# Altium PCB AMPURR.PcbDoc (part 2 of 6)
Units mm, origin at the board's own origin, x right, y up, seen from the top; angles counter-clockwise.
Board outline 100 x 100 mm, 4 copper layers (Top Layer, GND, VDD, Bottom Layer), stack 1.586 mm thick; 522 components, 281 nets, 1527 pads, 2431 vias.
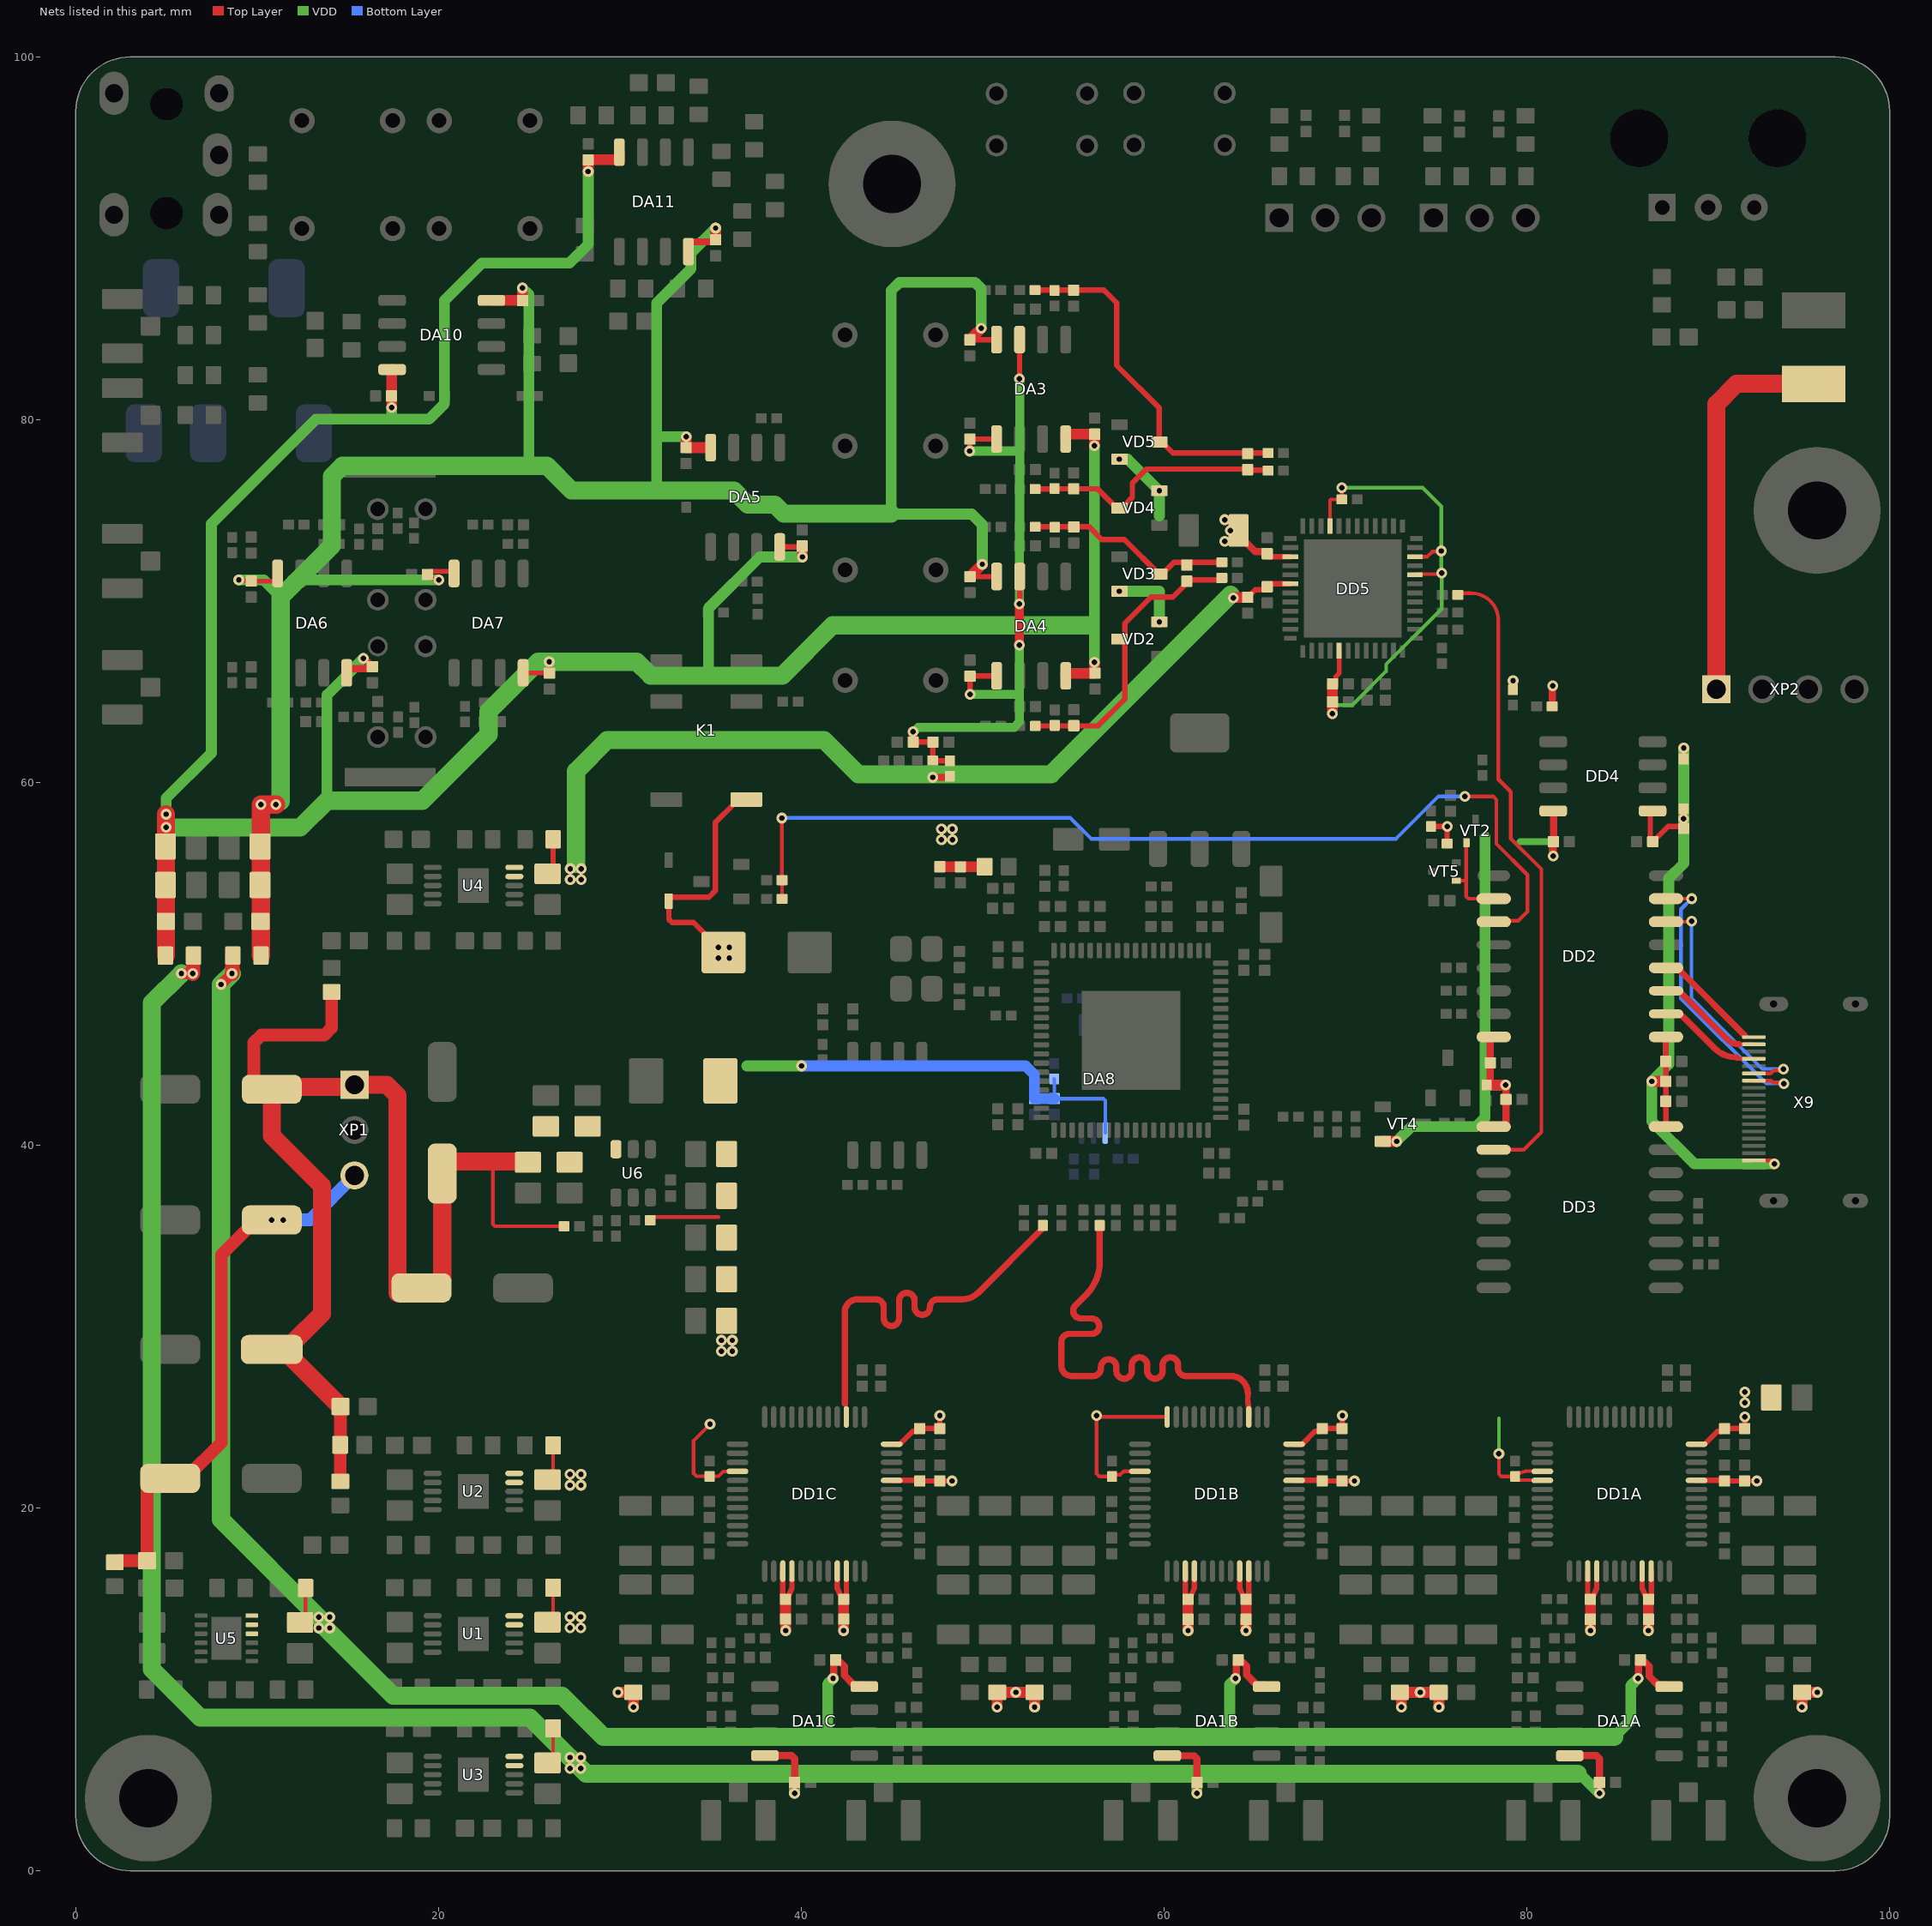
[diagram p4: the nets of this part, all layers, seen from the top]

## Footprints (in the part's own frame and the unit in brackets; to place one, negate y for a bottom-side part, rotate by r counter-clockwise, add the part's x,y. Pads: shape width x height; smd on the part's side, far side on the other; paste and mask are expansions set on the pad) (continued)
U.FL-R-SMT(10)_REC [mm]
  rrect15% 1.05x1.1 smd mask+0.05: 1(0,-1.55)
  rrect15% 1.1x2.25 smd mask+0.05: 2(-1.5,0) 2(1.5,0)
  Top Layer pour cut-out: -1,1.3 -1,-1.3 1,-1.3 1,1.3
  Top Layer keep-out region: -0.75,-0.85 0.75,-0.85 0.75,1.3 -0.75,1.3
  body extent -1.5,-1.55 1.5,1.55, height 1.25
WIMA5 [mm]
  round 1.4 hole 0.8: 1(-2.5,0) 2(2.5,0)
  silkscreen extent -3.63,-2.89 3.64,2.89, body extent -3.49,-2.75 3.51,2.77, height 11
WIMA_2,5x6,5x7,2#1 [mm]
  round 1.1 hole 0.8: 1(-2.5,0)
  round 1.2 hole 0.8: 2(2.5,0)
  silkscreen extent -3.63,-1.29 3.65,1.28, body extent -3.6,-1.25 3.6,1.25, height 6.5
WIMA_2,5x6,5x7,2#2 [mm]
  round 1.2 hole 0.8: 1(-2.5,0) 2(2.5,0)
  silkscreen extent -3.63,-1.29 3.65,1.28, body extent -3.6,-1.25 3.6,1.25, height 6.5

## Part data
C1A C1B C1C C8A C8B C8C C9A C9B C9C C18A C18B C18C C20A C20B C20C C23A C23B C23C C35 C36 C42 C109 C118 C119 C126 C127 C130 C132 C140 C146 C149 C151: library part "10uF  6.3V C0402", "CAP CER 10UF 6.3V X6S 0402", Manufacturer="Murata Electronics North America", Manufacturer P/N=GRM155C80J106ME11D, Operation Temperature="-55°C ~ 105°C", Package/Case=C0402, Power (V/A)=6.3V, Supplier Part Number 1=490-13233-2-ND, Temperature Coefficient=X6S, Tolerance=±20%, ComponentLink1Description=Datasheet, ComponentLink1URL=https://www.murata.com/~/media/webrenewal/support/library/catalog/products/capacitor/mlcc/c02e.ashx?la=en-us, Library Path 1=Capacitors.SchLib, Name Component="Capacitor Ceramic", Part Number="10uF  6.3V C0402", Supplier 1=Digi-key
C2A C2B C2C C3A C3B C3C C10A C10B C10C C14A C14B C14C C17A C17B C17C C19A C19B C19C C120 C121 C124 C129 C131 C133 C134 C135 C138 C141 C143 C147 C148 C150: library part "0.1uF  25V C0403", "CAP CER 0.1UF 25V X7R 0603", Manufacturer="Samsung Electro-Mechanics", Operation Temperature="-55°C ~ 125°C", Package/Case=C0403, Power (V/A)=25V, Supplier Part Number 1=1276-6854-2-ND, Temperature Coefficient=X7R, Tolerance=±10%, ComponentLink1Description=Datasheet, Library Path 1=Capacitors.SchLib, Name Component="Capacitor Ceramic", Part Number="0.1uF  25V C0403"
C4A C4B C4C C5A C5B C5C C6A C6B C6C C7A C7B C7C C26A C26B C26C C27A C27B C27C C28A C28B C28C C29A C29B C29C C105: library part "100uF  10V С1206", "CAP CER 100UF 10V X5T 1206", Operation Temperature="-55°C ~ 105°C", Package/Case=С1206, Power (V/A)=10V, Temperature Coefficient=X5R, Tolerance=±20%, ComponentLink1Description=Datasheet, Library Path 1=Capacitors.SchLib, Name Component="Capacitor Ceramic", Part Number="100uF  10V С1206", Supplier 1=Digi-key
C11A C11B C11C C24A C24B C24C: library part "33nF  16V C0402", "CAP CER 33NF 16V X7R 0402", Manufacturer="AVX Corporation", Operation Temperature="-55°C ~ 105°C", Package/Case=C0402, Power (V/A)=16V, Temperature Coefficient=X7R, Tolerance=±0.25pF, ComponentLink1Description=Datasheet, Library Path 1=Capacitors.SchLib, Name Component="Capacitor Ceramic", Part Number="33nF  16V C0402", Supplier 1=Digi-key
C12A C12B C12C C25A C25B C25C: library part "4.7nF  25V C0402", "CAP CER 4.7NF 25V NP0 0402", Manufacturer="AVX Corporation", Operation Temperature="-55°C ~ 105°C", Package/Case=C0402, Power (V/A)=25V, Temperature Coefficient="C0G, NP0", Tolerance=±0.25pF, ComponentLink1Description=Datasheet, Library Path 1=Capacitors.SchLib, Name Component="Capacitor Ceramic", Part Number="4.7nF  25V C0402", Supplier 1=Digi-key
C13A C13B C13C: library part "1uF  10V C0402", "CAP CER 1UF 10V X7S 0402", Manufacturer="Murata Electronics North America", Manufacturer P/N=GRM155C71A105KE11D, Operation Temperature="-55°C ~ 105°C", Package/Case=C0402, Power (V/A)=10V, Supplier Part Number 1=490-14457-2-ND, Temperature Coefficient=X7S, Tolerance=±10%, ComponentLink1Description=Datasheet, ComponentLink1URL=https://www.murata.com/~/media/webrenewal/support/library/catalog/products/capacitor/mlcc/c02e.ashx?la=en-us, Library Path 1=Capacitors.SchLib, Name Component="Capacitor Ceramic", Part Number="1uF  10V C0402", Supplier 1=Digi-key
C15A C15B C15C C21A C21B C21C C155 C161: library part "1.5nF  50V C0402", "CAP CER 1.5NF 50V NP0 0402", Manufacturer="AVX Corporation", Operation Temperature="-55°C ~ 105°C", Package/Case=C0402, Power (V/A)=50V, Temperature Coefficient="C0G, NP0", Tolerance=±0.25pF, ComponentLink1Description=Datasheet, Library Path 1=Capacitors.SchLib, Name Component="Capacitor Ceramic", Part Number="1.5nF  50V C0402", Supplier 1=Digi-key
C16A C16B C16C C22A C22B C22C: library part "10nF  50V C0402", "CAP CER 10NF 50V NP0 0402", Manufacturer="AVX Corporation", Operation Temperature="-55°C ~ 105°C", Package/Case=C0402, Power (V/A)=50V, Temperature Coefficient="C0G, NP0", Tolerance=±0.25pF, ComponentLink1Description=Datasheet, Library Path 1=Capacitors.SchLib, Name Component="Capacitor Ceramic", Part Number="10nF  50V C0402", Supplier 1=Digi-key
C30A C30B C30C C70: library part "0.1uF  25V C0403", "CAP CER 0.1UF 25V X7R 0402", Manufacturer="Samsung Electro-Mechanics", Operation Temperature="-55°C ~ 125°C", Package/Case=C0403, Power (V/A)=25V, Supplier Part Number 1=1276-6854-2-ND, Temperature Coefficient=X7R, Tolerance=±10%, ComponentLink1Description=Datasheet, Library Path 1=Capacitors.SchLib, Name Component="Capacitor Ceramic", Part Number="0.1uF  25V C0403"
C31A C31B C31C C32A C32B C32C C37 C38 C39 C40 C41 C43 C44 C94 C103 C104 C110 C116 C117 C164 C165 C166 C167 C170 C171 C172 C173: library part "0.1uF  25V C0402", "CAP CER 0.1UF 25V X7R 0603", Manufacturer="Samsung Electro-Mechanics", Operation Temperature="-55°C ~ 125°C", Package/Case=C0402, Power (V/A)=25V, Supplier Part Number 1=1276-6854-2-ND, Temperature Coefficient=X7R, Tolerance=±10%, ComponentLink1Description=Datasheet, Library Path 1=Capacitors.SchLib, Name Component="Capacitor Ceramic", Part Number="0.1uF  25V C0402"
C33 C45 C48 C53 C55 C61 C65 C67 C84 C91 C168 C192 C193: library part "0.1uF  50V C0603", "CAP CER 0.1UF 50V X7R 0603", Manufacturer="Samsung Electro-Mechanics", Manufacturer P/N=CL10B104KB8WPNC, Operation Temperature="-55°C ~ 125°C", Package/Case=C0603, Power (V/A)=50V, Supplier Part Number 1=1276-6854-2-ND, Temperature Coefficient=X7R, Tolerance=±10%, ComponentLink1Description=Datasheet, ComponentLink1URL=https://www.samsungsem.com/resources/file/global/support/product_catalog/MLCC.pdf, Library Path 1=Capacitors.SchLib, Name Component="Capacitor Ceramic", Notes="06035C104K4T4A, 06035C104K4T2A", Part Number="0.1uF  50V C0603", Supplier 1=Digi-key
C34: library part "10uF  35V C0603", "CAP CER 10UF 35V X5R 0603", Manufacturer="Murata Electronics North America", Manufacturer P/N=GRM188R6YA106MA73D, Operation Temperature="-55°C ~ 105°C", Package/Case=C0603, Power (V/A)=35V, Supplier Part Number 1=490-13248-2-ND, Temperature Coefficient=X5R, Tolerance=±20%, ComponentLink1Description=Datasheet, ComponentLink1URL=https://search.murata.co.jp/Ceramy/image/img/A01X/G101/ENG/GRM188R6YA106MA73-01.pdf, Library Path 1=Capacitors.SchLib, Name Component="Capacitor Ceramic", Part Number="10uF  35V C0603", Supplier 1=Digi-key
C46 C47 C49 C50 C54 C58 C59 C60 C68 C69 C72 C73 C74 C76 C77 C78 C79 C80 C81 C85 C89 C95 C97: library part "10uF  25V C0805", "CAP CER 10UF 25V X5R 0805", Manufacturer="Murata Electronics North America", Manufacturer P/N=GRM21BR61E106KA73L, Operation Temperature="-55°C ~ 105°C", Package/Case=C0805, Power (V/A)=25V, Supplier Part Number 1=490-5523-2-ND, Temperature Coefficient=X5R, Tolerance=±10%, ComponentLink1Description=Datasheet, ComponentLink1URL=https://www.murata.com/~/media/webrenewal/support/library/catalog/products/capacitor/mlcc/c02e.ashx?la=en-us, Library Path 1=Capacitors.SchLib, Name Component="Capacitor Ceramic", Notes="GRM21BR61E106KA73K, 08053D106KAT2A", Part Number="10uF  25V C0805", Supplier 1=Digi-key
C51 C52 C62 C63 C64: library part "4.7uF  25V C0603", "CAP CER 4.7UF 25V X6S 0603", Manufacturer="Murata Electronics North America", Manufacturer P/N=GRM188C81E475KE11D, Operation Temperature="-55°C ~ 105°C", Package/Case=C0603, Power (V/A)=25V, Supplier Part Number 1=490-7199-2-ND, Temperature Coefficient=X6S, Tolerance=±10%, ComponentLink1Description=Datasheet, ComponentLink1URL=https://www.murata.com/~/media/webrenewal/support/library/catalog/products/capacitor/mlcc/c02e.ashx?la=en-us, Library Path 1=Capacitors.SchLib, Name Component="Capacitor Ceramic", Notes=GRM188C81E475KE11J, Part Number="4.7uF  25V C0603", Supplier 1=Digi-key
C56 C57 C66 C189 C190 C191: library part "47uF  25V 6.3х5.3", "CAP ALUM POLY 47UF 10% 25V SMD", Manufacturer=SAMWHA, Manufacturer P/N=SMDCAP47mkf25v, Operation Temperature="-55°C ~ 125°C", Package/Case=6.3х5.3, Power (V/A)=25V, Supplier Part Number 1=00-00049951, Tolerance=±10%, ComponentLink1Description=Datasheet, ComponentLink1URL=http://www.kosmodrom.com.ua/pdf/SMD-RC-105C.pdf, Library Path 1=Capacitors.SchLib, Name Component="Aluminum - Polymer Capacitors", Part Number="47uF  25V 6.3х5.3", Supplier 1=kosmodrom
C71: library part "0.1uF  50V C0805", "CAP CER 0.1UF 50V X7R 0805", Manufacturer="AVX Corporation", Manufacturer P/N=08055C104KAT2A, Operation Temperature="-55°C ~ 105°C", Package/Case=C0805, Power (V/A)=50V, Supplier Part Number 1=478-1395-2-ND, Temperature Coefficient=X7R, Tolerance=±10%, ComponentLink1Description=Datasheet, ComponentLink1URL=http://catalogs.avx.com/SurfaceMount.pdf, Library Path 1=Capacitors.SchLib, Name Component="Capacitor Ceramic", Notes="08055C104KAT4A,08055C104KAJ2A, 08055C104KAJ4A", Part Number="0.1uF  50V C0805", Supplier 1=Digi-key
C75: library part "47uF  20V CASE-C", "CAP TANT 47UF 10% 20V 2312", Manufacturer=KEMET, Manufacturer P/N=T491C476K020AT, Operation Temperature="-55°C ~ 125°C", Package/Case=CASE-C, Power (V/A)=20V, Supplier Part Number 1=399-10176-2-ND, Temperature Coefficient=-, Tolerance=±10%, ComponentLink1Description=Datasheet, ComponentLink1URL=https://content.kemet.com/datasheets/KEM_T2005_T491.pdf, Library Path 1=Capacitors.SchLib, Name Component=CapacitorTantalum, Part Number="47uF  20V CASE-C", Supplier 1=Digi-key
C82 C99 C106 C112: library part "1nF  50V C0402", "CAP CER 1NF 50V NP0 0402", Manufacturer="AVX Corporation", Operation Temperature="-55°C ~ 105°C", Package/Case=C0402, Power (V/A)=50V, Temperature Coefficient="C0G, NP0", Tolerance=±0.25pF, ComponentLink1Description=Datasheet, Library Path 1=Capacitors.SchLib, Name Component="Capacitor Ceramic", Part Number="1nF  50V C0402", Supplier 1=Digi-key
C83 C100 C107 C113: library part "2.2uF  30В AC, 50В DC 5.5x10x7, 2мм", "CAP FILM 2.2UF 10% 100VDC", Manufacturer=WIMA, Manufacturer P/N=MKS2-2.2U/50-R, Operation Temperature="-55°C ~ 125°C", Package/Case="5.5x10x7, 2мм", Power (V/A)="30В AC, 50В DC", Tolerance=±10%, ComponentLink1Description=Datasheet, Library Path 1=Capacitors.SchLib, Name Component="Polypropylene (PP), Metallized", Part Number="2.2uF  30В AC, 50В DC 5.5x10x7, 2мм", Supplier 1=kosmodrom
C86 C87 C88 C92 C96 C98 C115: library part "0.1uF  25V C0402", "CAP CER 0.1UF 25V X7R 0402", Manufacturer="Samsung Electro-Mechanics", Operation Temperature="-55°C ~ 125°C", Package/Case=C0402, Power (V/A)=25V, Supplier Part Number 1=1276-6854-2-ND, Temperature Coefficient=X7R, Tolerance=±10%, ComponentLink1Description=Datasheet, Library Path 1=Capacitors.SchLib, Name Component="Capacitor Ceramic", Part Number="0.1uF  25V C0402"
C90 C102 C111 C114 C152 C158 C174 C175 C187 C188: library part "100pF  50V C0402", "CAP CER 100PF 50V NP0 0402", Manufacturer="AVX Corporation", Operation Temperature="-55°C ~ 105°C", Package/Case=C0402, Power (V/A)=50V, Temperature Coefficient="C0G, NP0", Tolerance=±0.25pF, ComponentLink1Description=Datasheet, Library Path 1=Capacitors.SchLib, Name Component="Capacitor Ceramic", Part Number="100pF  50V C0402", Supplier 1=Digi-key
C93: library part "10uF  16V C0402", "CAP CER 10UF 16V X7R 0402", Manufacturer="AVX Corporation", Operation Temperature="-55°C ~ 105°C", Package/Case=C0402, Power (V/A)=16V, Temperature Coefficient=X7R, Tolerance=±0.25pF, ComponentLink1Description=Datasheet, Library Path 1=Capacitors.SchLib, Name Component="Capacitor Ceramic", Part Number="10uF  16V C0402", Supplier 1=Digi-key
C101 C108: library part "15nF  25V C0402", "CAP CER NPO 15nF 25V", Manufacturer="Samsung Electro-Mechanics", Operation Temperature="-55°C ~ 85°C", Package/Case=C0402, Power (V/A)=25V, Temperature Coefficient="C0G, NP0", Tolerance=10%, ComponentLink1Description=Datasheet, ComponentLink1URL=https://www.samsungsem.com/resources/file/global/support/product_catalog/MLCC.pdf, Library Path 1=Capacitors.SchLib, Name Component="Capacitor Ceramic", Part Number="15nF  25V C0402", Supplier 1=Digi-key
C122 C128 C139 C142: library part "10nF  50V C0402", "CAP CER 10NF 50V NP0 0603", Manufacturer="AVX Corporation", Operation Temperature="-55°C ~ 105°C", Package/Case=C0402, Power (V/A)=50V, Temperature Coefficient="C0G, NP0", Tolerance=±0.25pF, ComponentLink1Description=Datasheet, Library Path 1=Capacitors.SchLib, Name Component="Capacitor Ceramic", Part Number="10nF  50V C0402", Supplier 1=Digi-key
C123 C125: library part "10uF  16V CASE-A", "CAP TANT 10UF 20% 16V 1206", Manufacturer=KEMET, Manufacturer P/N=T491A106M016AT, Operation Temperature="-55°C ~ 125°C", Package/Case=CASE-A, Power (V/A)=16V, Supplier Part Number 1=399-3687-2-ND, Temperature Coefficient=-, Tolerance=±20%, ComponentLink1Description=Datasheet, ComponentLink1URL=https://content.kemet.com/datasheets/KEM_T2005_T491.pdf, Library Path 1=Capacitors.SchLib, Name Component=CapacitorTantalum, Part Number="10uF  16V CASE-A", Supplier 1=Digi-key
C136: library part "5.6nF  50V C0402", "CAP CER 5.6NF 50V NP0 0603", Manufacturer="AVX Corporation", Operation Temperature="-55°C ~ 105°C", Package/Case=C0402, Power (V/A)=50V, Temperature Coefficient="C0G, NP0", Tolerance=±0.25pF, ComponentLink1Description=Datasheet, Library Path 1=Capacitors.SchLib, Name Component="Capacitor Ceramic", Part Number="5.6nF  50V C0402", Supplier 1=Digi-key
C137: library part "100pF  50V C0402", "CAP CER 100PF 50V NP0 0603", Manufacturer="AVX Corporation", Operation Temperature="-55°C ~ 105°C", Package/Case=C0402, Power (V/A)=50V, Temperature Coefficient="C0G, NP0", Tolerance=±0.25pF, ComponentLink1Description=Datasheet, Library Path 1=Capacitors.SchLib, Name Component="Capacitor Ceramic", Part Number="100pF  50V C0402", Supplier 1=Digi-key
C144 C145: library part "18pF  50V C0402", "CAP CER 18PF 50V NP0 0603", Manufacturer="AVX Corporation", Operation Temperature="-55°C ~ 105°C", Package/Case=C0402, Power (V/A)=50V, Temperature Coefficient="C0G, NP0", Tolerance=±0.25pF, ComponentLink1Description=Datasheet, Library Path 1=Capacitors.SchLib, Name Component="Capacitor Ceramic", Part Number="18pF  50V C0402", Supplier 1=Digi-key
C153 C157 C159 C163: library part "47pF  50V C0402", "CAP CER 47PF 50V NP0 0402", Manufacturer="AVX Corporation", Operation Temperature="-55°C ~ 105°C", Package/Case=C0402, Power (V/A)=50V, Temperature Coefficient="C0G, NP0", Tolerance=±0.25pF, ComponentLink1Description=Datasheet, Library Path 1=Capacitors.SchLib, Name Component="Capacitor Ceramic", Part Number="47pF  50V C0402", Supplier 1=Digi-key
C154 C160: library part "33n  AC40V DC63V 2,5x6,5x7,2", "WIMA 33NF, 40VAC, 63VDC: 5mm, ± 10%", Manufacturer=WIMA, Manufacturer P/N=MKS2-33N/63, Package/Case=2,5x6,5x7,2, Power (V/A)="AC40V DC63V", Temperature Coefficient=pp, Tolerance=10%, ComponentLink1Description=Datasheet, Library Path 1=Capacitors.SchLib, Name Component="Polypropylene (PP), Metallized", Part Number="33n  AC40V DC63V 2,5x6,5x7,2", Supplier 1=kosmodrom
C156 C162: library part "100n  AC40V DC63V 2,5x6,5x7,2", "WIMA 100NF, 40VAC, 63VDC: 5mm, ± 10%", Manufacturer=WIMA, Manufacturer P/N=MKS2-100N/63, Package/Case=2,5x6,5x7,2, Power (V/A)="AC40V DC63V", Temperature Coefficient=pp, Tolerance=10%, ComponentLink1Description=Datasheet, Library Path 1=Capacitors.SchLib, Name Component="Polypropylene (PP), Metallized", Part Number="100n  AC40V DC63V 2,5x6,5x7,2", Supplier 1=kosmodrom
C169 C176 C184 C186: library part "330nF  AC40V DC63V 2,5x6,5x7,2", "WIMA 330NF, 40VAC, 63VDC: 5mm, ± 10%", Manufacturer=WIMA, Manufacturer P/N=MKS2-100N/63, Package/Case=2,5x6,5x7,2, Power (V/A)="AC40V DC63V", Temperature Coefficient=pp, Tolerance=10%, ComponentLink1Description=Datasheet, Library Path 1=Capacitors.SchLib, Name Component="Polypropylene (PP), Metallized", Part Number="330nF  AC40V DC63V 2,5x6,5x7,2", Supplier 1=kosmodrom
C177 C178 C180 C185: library part "47pF  50V C0603", "CAP CER 47PF 50V X7R 0603", Manufacturer="AVX Corporation", Manufacturer P/N=06035C470KAT2A, Operation Temperature="-55°C ~ 105°C", Package/Case=C0603, Power (V/A)=50V, Supplier Part Number 1=06035C470KAT2A-ND, Temperature Coefficient=X7R, Tolerance=±10%, ComponentLink1Description=Datasheet, ComponentLink1URL=http://catalogs.avx.com/SurfaceMount.pdf, Library Path 1=Capacitors.SchLib, Name Component="Capacitor Ceramic", Part Number="47pF  50V C0603", Supplier 1=Digi-key
C179 C181 C182 C183: library part "1uF  30В AC, 50В DC 5.5x10x7, 2мм", "CAP FILM 1UF 10% 100VDC", Manufacturer=WIMA, Manufacturer P/N=MKS2-1U/50-R, Operation Temperature="-55°C ~ 125°C", Package/Case="5.5x10x7, 2мм", Power (V/A)="30В AC, 50В DC", Tolerance=±10%, ComponentLink1Description=Datasheet, Library Path 1=Capacitors.SchLib, Name Component="Polypropylene (PP), Metallized", Part Number="1uF  30В AC, 50В DC 5.5x10x7, 2мм", Supplier 1=kosmodrom
DA1A DA1B DA1C DA3 DA4 DA5 DA6 DA7 DA10 DA11: "Audio Amplifier 2 Circuit Rail-to-Rail 8-SOIC", Manufacturer="Texas Instruments", Operation Temperature="-40°C ~ 85°C", Package/Case=8-SOIC, Power (V/A)=4.5V-36, Supplier Part Number 1=296-39098-6-ND, ComponentLink1Description=Datasheet, ComponentLink1URL=https://www.ti.com/general/docs/suppproductinfo.tsp?distId=10&gotoUrl=https%3A%2F%2Fwww.ti.com%2Flit%2Fgpn%2Fopa1611, Library Path 1="Integrated Circuit.SchLib", Manufacturer P/N=OPA1612AIDR, Name Component="Operational amplifier", Part Number=OPA1612AIDR, Supplier 1=Digi-key
DA2: "Fiber Optic Receiver General Data Transfer 16Mbps -27dBm 2.4V ~ 5.5V 12 mA", Manufacturer="Everlight Electronics Co Ltd", Package/Case=PLR135, Power (V/A)="2.4V ~ 5.5V", ComponentLink1Description=Datasheet, ComponentLink1URL=https://mm.digikey.com/Volume0/opasdata/d220001/medias/docus/6601/PLR135_T9.pdf, Library Path 1=Opto.SchLib, Manufacturer P/N=PLR135-T9, Name Component="Fiber Optic Receivers", Part Number=PLR135-T9, Supplier 1=Digi-key
DA8: "Clock Fanout Buffer (Distribution) IC 1:4 250 MHz 8-TSSOP (0.173\", 4.40mm Width)", Manufacturer="Texas Instruments", Operation Temperature="-40°C ~ 125°C", Package/Case=8-TSSOP, Power (V/A)="1.8 V ~ 3.6 V", ComponentLink1Description=Datasheet, ComponentLink1URL=https://www.ti.com/general/docs/suppproductinfo.tsp?distId=10&gotoUrl=https%3A%2F%2Fwww.ti.com%2Flit%2Fgpn%2Flmk1c1104, Library Path 1="Integrated Circuit.SchLib", Name Component="CLOCK BUFFER", Part Number=LMK1C1104PWR, Supplier 1=Digi-key
DA9: "Shunt Voltage Reference IC Adjustable 1.24V 16 VV ±0.5% 20 mA SOT-23-3 (TO-236)", Manufacturer=onsemi, Operation Temperature="-40°C ~ 125°C (TA)", Package/Case=SOT-23-3, Power (V/A)="1.24V, 16 V", Supplier Part Number 1=TLV431BSN1T1GOSTR-ND, ComponentLink1Description=Datasheet, ComponentLink1URL=https://www.onsemi.com/pdf/datasheet/tlv431a-d.pdf, Library Path 1="Integrated Circuit.SchLib", Manufacturer P/N=TLV431BSN1T1G, Name Component="Voltage Reference", Part Number=TLV431BSN1T1G, Supplier 1=Digi-key
DD1A DD1B DD1C: "IC DAC/AUDIO 32BIT 768K 48LQFP (7x7)", Manufacturer="Asahi Kasei Microdevices/AKM", Operation Temperature="-40°C ~ 85°C", Package/Case=48-LQFP, Power (V/A)=---, Supplier Part Number 1=974-AK4493SEQDKR-ND, ComponentLink1Description=Datasheet, ComponentLink1URL=https://www.akm.com/global/en/products/audio/audio-dac/ak4493seq/, Library Path 1="Integrated Circuit.SchLib", Manufacturer P/N=AK4493SEQ, Name Component="Audio DAC", Part Number=AK4493SEQ, Supplier 1=Digi-key
DD2 DD3: "General Purpose Digital Isolator 1000Vrms 6 Channel 150Mbps 35kV/µs CMTI 16-SOIC (0.154\", 3.90mm Width)", Manufacturer="Skyworks Solutions Inc.", Operation Temperature="-40°C ~ 125°C", Package/Case=16-SOIC, Power (V/A)="2.5V ~ 5.5V", Supplier Part Number 1=336-2115-5-ND, ComponentLink1Description=Datasheet, ComponentLink1URL=https://eu.mouser.com/datasheet/2/472/si866x-2507613.pdf, Library Path 1="Integrated Circuit.SchLib", Manufacturer P/N=SI8660BA-B-IS1, Name Component="ISOLATOR I2S", Part Number=SI8660BA-B-IS1, Supplier 1=Digi-key
DD4: "I2C Digital Isolator 2500Vrms 2 Channel 1Mbps 25kV/µs CMTI 8-SOIC (0.154\", 3.90mm Width)", Manufacturer="Texas Instruments", Manufacturer P/N=296-34871-1-ND, Operation Temperature="-40°C ~ 125°C", Package/Case=8-SOIC, Power (V/A)="3V ~ 5.5V", ComponentLink1Description=Datasheet, ComponentLink1URL=https://www.ti.com/general/docs/suppproductinfo.tsp?distId=10&gotoUrl=https%3A%2F%2Fwww.ti.com%2Flit%2Fgpn%2Fiso1540, Library Path 1="Integrated Circuit.SchLib", Name Component="I2C ISOLATOR", Part Number=ISO1540DR, Supplier 1=Digi-key
DD5: "ADC, Audio 32 b 768k DSD, I2S 48-QFN (7x7)", Manufacturer="Asahi Kasei Microdevices/AKM", Operation Temperature="-40°C ~ 105°C", Package/Case="48-QFN (7x7)", Power (V/A)="1.8V, 5V", Supplier Part Number 1=974-1116-2-ND, ComponentLink1Description=Datasheet, ComponentLink1URL=https://www.akm.com/content/dam/documents/products/audio/audio-adc/ak5572en/ak5572en-en-datasheet.pdf, Library Path 1="Integrated Circuit.SchLib", Manufacturer P/N=AK5572EN, Name Component="Audio ADC", Part Number=AK5572EN, Supplier 1=Digi-key
DD6: "300 MHZ 32BIT SIGMADSP AUDIO PRO", Manufacturer="Analog Devices Inc.", Operation Temperature="0°C ~ 70°C (TA)", Package/Case="72-VFQFN Exposed Pad", Power (V/A)=---, Supplier Part Number 1=505-ADAU1452KCPZ-ND, ComponentLink1Description=Datasheet, ComponentLink1URL=https://www.analog.com/media/en/technical-documentation/data-sheets/ADAU1452_1451_1450.pdf, Library Path 1="Integrated Circuit.SchLib", Manufacturer P/N=ADAU1452KCPZ, Name Component="Digital Signal Processors", Part Number=ADAU1452KCPZ, Supplier 1=Digi-key
DD7: "EEPROM Memory IC 1Mbit SPI 20 MHz 8-SOIJ", Manufacturer="Microchip Technology", Operation Temperature="-40°C ~ 85°C (TA)", Package/Case=8-SOIC, Power (V/A)="2.5V ~ 5.5V", Supplier Part Number 1=25LC1024-I/SM-ND, ComponentLink1Description=Datasheet, ComponentLink1URL=https://ww1.microchip.com/downloads/aemDocuments/documents/MPD/ProductDocuments/DataSheets/25LC1024-1-Mbit-SPI-Bus-Serial-EEPROM-20002064E.pdf, Library Path 1="Integrated Circuit.SchLib", Manufacturer P/N=25LC1024-I/SM, Name Component=Memory, Part Number=25LC1024-I/SM, Supplier 1=Digi-key
E1: Package/Case=22x17mm, Library Path 1=Others.SchLib, Part Number=MS
FB1 FB2 FB3 FB4 FB5: "FERRITE BEAD 1 KOHM 0603 1LN", Manufacturer="Murata Electronics North America", Manufacturer P/N=BLM18KG102SN1D, Package/Case="0603 (1608 Metric)", Power (V/A)=1A, Supplier Part Number 1=490-17349-2-ND, Tolerance=±25%, ComponentLink1Description=Datasheet, ComponentLink1URL=https://media.digikey.com/pdf/Data%20Sheets/Murata%20PDFs/BLM18yyyyyyN1x.pdf, Library Path 1=Inductance.SchLib, Name Component="Ferrite Beads", Part Number=BLM18KG102, Supplier 1=Digi-key
K1: "4.5VDC, 2 form C (DPDT), 1A, AgNi + Au", Arrow Part Number=HFD31/5, Manufacturer=HONGFA, Manufacturer_Name=Hongfa, Part Number=HFD315, Power (V/A)="2A 30V", Arrow Price/Stock=https://www.arrow.com/en/products/hfd315/hongfa-europe-gmbh?region=europe, ComponentLink1Description=Datasheet, ComponentLink1URL=https://kosmodrom.ua/storage/pdf/FTR-B4.pdf, Datasheet Link=https://source.hongfa.com//Api/DownloadPdf/152, Height=5.4mm, Library Path 1=Others.SchLib, Manufacturer_Part_Number=HFD31/5, Name Component=Relay, Supplier 1=RCS
L1: "FIXED IND 47UH 280MA 1.1 OHM SMD", Manufacturer=MurataElectronics, Manufacturer P/N=LQH43CN470K03L, Operation Temperature="-40°C ~ 85°C", Power (V/A)="0.28 A", Supplier Part Number 1=490-2521-2-ND, Tolerance=±10, ComponentLink1Description=Datasheet, ComponentLink1URL=https://search.murata.co.jp/Ceramy/image/img/P02/JELF243A-0042.pdf, Library Path 1=Inductance.SchLib, Name Component="Fixed Inductors", Part Number=LQH43CN470K03, Supplier 1=Digi-key
L2: "6.8 µH Shielded Inductor 4.5 A 50mOhm Max Nonstandard", Manufacturer="TAI-TECH Advanced Electronics Co., Ltd.", Operation Temperature="-40°C ~ 125°C", Package/Case="7.10mm x 6.60mm", Power (V/A)=4.5A, Supplier Part Number 1=4816-TMPA0603S-6R8MN-DTR-ND, Tolerance=±20%, ComponentLink1Description=Datasheet, ComponentLink1URL=https://mm.digikey.com/Volume0/opasdata/d220001/medias/docus/5057/TMPA-Series_N.pdf, Library Path 1=Inductance.SchLib, Name Component="Fixed Inductors", Part Number=TMPA0603S-6R8MN-D, Supplier 1=Digi-key
R1A R1B R1C R2A R2B R2C R17A R17B R17C R18A R18B R18C R57 R64: library part "10  R0603", "RES SMD 10 OHM  ±1% 1/10W 0603", Operation Temperature="-55℃ to 155℃", Package/Case=0603, Power Rating=0.1W, Temperature Coefficient="±200 ppm/°C", Tolerance=±1%, Library Path 1=Resistor.SchLib, Name Component=Resistror, Part Number="10  R0603"
R3A R3B R3C R5A R5B R5C R13A R13B R13C R15A R15B R15C: library part "300  R0402", "RES SMD 300 OHM  ±1% 1/16W 0402", Operation Temperature="-55℃ to 155℃", Package/Case=0402, Power Rating=0.063W, Temperature Coefficient="±100 ppm/°C", Tolerance=±1%, Library Path 1=Resistor.SchLib, Name Component=Resistror, Part Number="300  R0402"
R4A R4B R4C R14A R14B R14C: library part "27  R0402", "RES SMD 27 OHM  ±1% 1/16W 0402", Operation Temperature="-55℃ to 155℃", Package/Case=0402, Power Rating=0.063W, Temperature Coefficient="±100 ppm/°C", Tolerance=±1%, Library Path 1=Resistor.SchLib, Name Component=Resistror, Part Number="27  R0402"
R6A R6B R6C R9A R9B R9C R10A R10B R10C R11A R11B R11C: library part "910  R0402", "RES SMD 910 OHM  ±1% 1/16W 0402", Operation Temperature="-55℃ to 155℃", Package/Case=0402, Power Rating=0.063W, Temperature Coefficient="±100 ppm/°C", Tolerance=±1%, Library Path 1=Resistor.SchLib, Name Component=Resistror, Part Number="910  R0402"
R7A R7B R7C R12A R12B R12C: library part "91  R0402", "RES SMD 91 OHM  ±1% 1/16W 0402", Operation Temperature="-55℃ to 155℃", Package/Case=0402, Power Rating=0.063W, Temperature Coefficient="±100 ppm/°C", Tolerance=±1%, Library Path 1=Resistor.SchLib, Name Component=Resistror, Part Number="91  R0402"
R8A R8B R8C R25 R83 R84: library part "1 k  R0402", "RES SMD 1 k OHM  ±1% 1/16W 0402", Operation Temperature="-55℃ to 155℃", Package/Case=0402, Power Rating=0.063W, Temperature Coefficient="±100 ppm/°C", Tolerance=±1%, Library Path 1=Resistor.SchLib, Name Component=Resistror, Part Number="1 k  R0402"
R16A R16B R16C R29 R31 R56 R58 R77 R79 R105 R106: library part "4.7 k  R0402", "RES SMD 4.7 k OHM  ±1% 1/16W 0402", Operation Temperature="-55℃ to 155℃", Package/Case=0402, Power Rating=0.063W, Temperature Coefficient="±100 ppm/°C", Tolerance=±1%, Library Path 1=Resistor.SchLib, Name Component=Resistror, Part Number="4.7 k  R0402"
R19: library part "10 k  R0603", "RES SMD 10 k OHM  ±1% 1/10W 0603", Operation Temperature="-55℃ to 155℃", Package/Case=0603, Power Rating=0.1W, Temperature Coefficient="±100 ppm/°C", Tolerance=±1%, Library Path 1=Resistor.SchLib, Name Component=Resistror, Part Number="10 k  R0603"
R20 R30 R103 R107 R127: library part "100  R0402", "RES SMD 100 OHM  ±1% 1/16W 0402", Operation Temperature="-55℃ to 155℃", Package/Case=0402, Power Rating=0.063W, Temperature Coefficient="±100 ppm/°C", Tolerance=±1%, Library Path 1=Resistor.SchLib, Name Component=Resistror, Part Number="100  R0402"
R21 R53 R69 R81 R114 R121 R128 R129 R147 R154: library part "100 k  R0402", "RES SMD 100 k OHM  ±1% 1/16W 0402", Operation Temperature="-55℃ to 155℃", Package/Case=0402, Power Rating=0.063W, Temperature Coefficient="±100 ppm/°C", Tolerance=±1%, Library Path 1=Resistor.SchLib, Name Component=Resistror, Part Number="100 k  R0402"
R22 R23 R24 R26 R27 R28 R74 R75 R76 R85 R86 R87 R88 R89 R90 R91 R92 R93 R94 R95 R96: library part "51  R0402", "RES SMD 51 OHM  ±1% 1/16W 0402", Operation Temperature="-55℃ to 155℃", Package/Case=0402, Power Rating=0.063W, Temperature Coefficient="±100 ppm/°C", Tolerance=±1%, Library Path 1=Resistor.SchLib, Name Component=Resistror, Part Number="51  R0402"
R32 R33 R41: library part "680 k  R0603", "RES SMD 680 k OHM  ±1% 1/10W 0603", Operation Temperature="-55℃ to 155℃", Package/Case=0603, Power Rating=0.1W, Temperature Coefficient="±100 ppm/°C", Tolerance=±1%, Library Path 1=Resistor.SchLib, Name Component=Resistror, Part Number="680 k  R0603"
R34 R43 R144 R156: library part "47 k  R0603", "RES SMD 47 k OHM  ±1% 1/10W 0603", Operation Temperature="-55℃ to 155℃", Package/Case=0603, Power Rating=0.1W, Temperature Coefficient="±100 ppm/°C", Tolerance=±1%, Library Path 1=Resistor.SchLib, Name Component=Resistror, Part Number="47 k  R0603"
R35: library part "51 k  R0603", "RES SMD 51 k OHM  ±1% 1/10W 0603", Operation Temperature="-55℃ to 155℃", Package/Case=0603, Power Rating=0.1W, Temperature Coefficient="±100 ppm/°C", Tolerance=±1%, Library Path 1=Resistor.SchLib, Name Component=Resistror, Part Number="51 k  R0603"
R36 R38 R44 R46: library part "1 k  R0603", "RES SMD 1 k OHM  ±1% 1/10W 0603", Operation Temperature="-55℃ to 155℃", Package/Case=0603, Power Rating=0.1W, Temperature Coefficient="±100 ppm/°C", Tolerance=±1%, Library Path 1=Resistor.SchLib, Name Component=Resistror, Part Number="1 k  R0603"
R37 R47 R146 R153: library part "100 k  R0603", "RES SMD 100 k OHM  ±1% 1/10W 0603", Operation Temperature="-55℃ to 155℃", Package/Case=0603, Power Rating=0.1W, Temperature Coefficient="±100 ppm/°C", Tolerance=±1%, Library Path 1=Resistor.SchLib, Name Component=Resistror, Part Number="100 k  R0603"
R39: library part "33 k  R0603", "RES SMD 33 k OHM  ±1% 1/10W 0603", Operation Temperature="-55℃ to 155℃", Package/Case=0603, Power Rating=0.1W, Temperature Coefficient="±100 ppm/°C", Tolerance=±1%, Library Path 1=Resistor.SchLib, Name Component=Resistror, Part Number="33 k  R0603"
R40 R51: library part "1 M  R0603", "RES SMD 1 M OHM  ±1% 1/10W 0603", Operation Temperature="-55℃ to 155℃", Package/Case=0603, Power Rating=0.1W, Temperature Coefficient="±100 ppm/°C", Tolerance=±1%, Library Path 1=Resistor.SchLib, Name Component=Resistror, Part Number="1 M  R0603"
R42 R50: library part "30 k  R0603", "RES SMD 30 k OHM  ±1% 1/10W 0603", Operation Temperature="-55℃ to 155℃", Package/Case=0603, Power Rating=0.1W, Temperature Coefficient="±100 ppm/°C", Tolerance=±1%, Library Path 1=Resistor.SchLib, Name Component=Resistror, Part Number="30 k  R0603"
R45 R49: library part "110 k  R0603", "RES SMD 110 k OHM  ±1% 1/10W 0603", Operation Temperature="-55℃ to 155℃", Package/Case=0603, Power Rating=0.1W, Temperature Coefficient="±100 ppm/°C", Tolerance=±1%, Library Path 1=Resistor.SchLib, Name Component=Resistror, Part Number="110 k  R0603"
R48: library part "120 k  R0603", "RES SMD 120 k OHM  ±1% 1/10W 0603", Operation Temperature="-55℃ to 155℃", Package/Case=0603, Power Rating=0.1W, Temperature Coefficient="±100 ppm/°C", Tolerance=±1%, Library Path 1=Resistor.SchLib, Name Component=Resistror, Part Number="120 k  R0603"
R52: library part "200 k  R0402", "RES SMD 200 k OHM  ±1% 1/16W 0402", Operation Temperature="-55℃ to 155℃", Package/Case=0402, Power Rating=0.063W, Temperature Coefficient="±100 ppm/°C", Tolerance=±1%, Library Path 1=Resistor.SchLib, Name Component=Resistror, Part Number="200 k  R0402"
R54 R111 R119: library part "22 k  R0402", "RES SMD 22 k OHM  ±1% 1/16W 0402", Operation Temperature="-55℃ to 155℃", Package/Case=0402, Power Rating=0.063W, Temperature Coefficient="±100 ppm/°C", Tolerance=±1%, Library Path 1=Resistor.SchLib, Name Component=Resistror, Part Number="22 k  R0402"
R55 R65 R70 R78: library part "33 k  R0402", "RES SMD 33 k OHM  ±1% 1/16W 0402", Operation Temperature="-55℃ to 155℃", Package/Case=0402, Power Rating=0.063W, Temperature Coefficient="±100 ppm/°C", Tolerance=±1%, Library Path 1=Resistor.SchLib, Name Component=Resistror, Part Number="33 k  R0402"
R59 R60 R61 R66 R67 R71 R72 R80 R99 R108 R109 R110: library part "10 k  R0402", "RES SMD 10 k OHM  ±1% 1/16W 0402", Operation Temperature="-55℃ to 155℃", Package/Case=0402, Power Rating=0.063W, Temperature Coefficient="±100 ppm/°C", Tolerance=±1%, Library Path 1=Resistor.SchLib, Name Component=Resistror, Part Number="10 k  R0402"
R62 R68 R73 R82 R131 R132 R133 R134: library part "10  R0402", "RES SMD 10 OHM  ±1% 1/16W 0402", Operation Temperature="-55℃ to 155℃", Package/Case=0402, Power Rating=0.063W, Temperature Coefficient="±200 ppm/°C", Tolerance=±1%, Library Path 1=Resistor.SchLib, Name Component=Resistror, Part Number="10  R0402"
R63: library part "510  R0402", "RES SMD 510 OHM  ±1% 1/16W 0402", Operation Temperature="-55℃ to 155℃", Package/Case=0402, Power Rating=0.063W, Temperature Coefficient="±100 ppm/°C", Tolerance=±1%, Library Path 1=Resistor.SchLib, Name Component=Resistror, Part Number="510  R0402"
R97: library part "4.3 k  R0402", "RES SMD 4.3 k OHM  ±1% 1/16W 0402", Operation Temperature="-55℃ to 155℃", Package/Case=0402, Power Rating=0.063W, Temperature Coefficient="±100 ppm/°C", Tolerance=±1%, Library Path 1=Resistor.SchLib, Name Component=Resistror, Part Number="4.3 k  R0402"
R98 R100 R101 R102 R104: library part "22  R0402", "RES SMD 22 OHM  ±1% 1/16W 0402", Operation Temperature="-55℃ to 155℃", Package/Case=0402, Power Rating=0.063W, Temperature Coefficient="±100 ppm/°C", Tolerance=±1%, Library Path 1=Resistor.SchLib, Name Component=Resistror, Part Number="22  R0402"
R112 R113 R116 R120 R122 R124: library part "3.3 k  R0402", "RES SMD 3.3 k OHM  ±1% 1/16W 0402", Operation Temperature="-55℃ to 155℃", Package/Case=0402, Power Rating=0.063W, Temperature Coefficient="±100 ppm/°C", Tolerance=±1%, Library Path 1=Resistor.SchLib, Name Component=Resistror, Part Number="3.3 k  R0402"
R115 R123 R130: library part "47 k  R0402", "RES SMD 47 k OHM  ±1% 1/16W 0402", Operation Temperature="-55℃ to 155℃", Package/Case=0402, Power Rating=0.063W, Temperature Coefficient="±100 ppm/°C", Tolerance=±1%, Library Path 1=Resistor.SchLib, Name Component=Resistror, Part Number="47 k  R0402"
R117 R118 R125 R126: library part "150  R0402", "RES SMD 150 OHM  ±1% 1/16W 0402", Operation Temperature="-55℃ to 155℃", Package/Case=0402, Power Rating=0.063W, Temperature Coefficient="±100 ppm/°C", Tolerance=±1%, Library Path 1=Resistor.SchLib, Name Component=Resistror, Part Number="150  R0402"
R135 R137 R141 R142 R143 R145 R148 R149 R150 R151 R152 R155 R164 R166 R168 R169: library part "22 k  R0603", "RES SMD 22 k OHM  ±1% 1/10W 0603", Operation Temperature="-55℃ to 155℃", Package/Case=0603, Power Rating=0.1W, Temperature Coefficient="±100 ppm/°C", Tolerance=±1%, Library Path 1=Resistor.SchLib, Name Component=Resistror, Part Number="22 k  R0603"
R136 R140 R171 R174: library part "100  R0603", "RES SMD 100 OHM  ±1% 1/10W 0603", Operation Temperature="-55℃ to 155℃", Package/Case=0603, Power Rating=0.1W, Temperature Coefficient="±100 ppm/°C", Tolerance=±1%, Library Path 1=Resistor.SchLib, Name Component=Resistror, Part Number="100  R0603"
R138 R139 R172 R173: library part "560 k  R0603", "RES SMD 560 k OHM  ±1% 1/10W 0603", Operation Temperature="-55℃ to 155℃", Package/Case=0603, Power Rating=0.1W, Temperature Coefficient="±100 ppm/°C", Tolerance=±1%, Library Path 1=Resistor.SchLib, Name Component=Resistror, Part Number="560 k  R0603"
U1 U2 U3 U4: "Linear Voltage Regulator IC Positive Adjustable 1 Output 200mA 10-MSOP-EP 117dB ~ 56dB (120Hz ~ 10MHz)", Arrow Part Number=LT3042IMSE#PBF, Manufacturer_Name="Analog Devices", Mouser Part Number=584-LT3042IMSE#PBF, Operation Temperature="-40°C ~ 125°C (TJ)", Package/Case=10-MSOP-EP, Power (V/A)="2 - 20V", Arrow Price/Stock=https://www.arrow.com/en/products/lt3042imsepbf/analog-devices?utm_currency=USD&region=europe, ComponentDescription="Linear Voltage Regulator LT3042  (10-MSOP-EP)", ComponentLink1Description=Datasheet, ComponentLink1URL=https://www.analog.com/media/en/technical-documentation/data-sheets/3042fb.pdf, Datasheet Link=https://www.analog.com/media/en/technical-documentation/data-sheets/3042fb.pdf, Height=1.1mm, Library Path 1="Power converters.SchLib", Manufacturer_Part_Number=LT3042IMSE#PBF, Mouser Price/Stock=https://www.mouser.co.uk/ProductDetail/Analog-Devices/LT3042IMSEPBF?qs=oahfZPh6IAKNLbWsEo0jgA%3D%3D, Name Component="Linear Voltage Regulator", Part Number=LT3042, Supplier 1=Digi-key, Supplier Part Number 1=LT3042IMSE#PBF
U5: "Linear Voltage Regulator IC Negative Adjustable 1 Output 500mA 12-DFN (3x3) 108dB ~ 28dB (120Hz ~ 10MHz)", Arrow Part Number=LT3042IMSE#PBF, Manufacturer="Analog Devices Inc.", Manufacturer P/N=LT3094EDD#TRPBF, Manufacturer_Name="Analog Devices", Mouser Part Number=584-LT3042IMSE#PBF, Operation Temperature="-40°C ~ 125°C (TJ)", Package/Case="12-DFN (3x3)", Power (V/A)=-2.3…-19.4V, Supplier Part Number 1=505-LT3094EDD#TRPBFTR-ND, Arrow Price/Stock=https://www.arrow.com/en/products/lt3042imsepbf/analog-devices?utm_currency=USD&region=europe, ComponentDescription="Linear Voltage Regulator LT3094  (12-DFN (3x3))", ComponentLink1Description=Datasheet, ComponentLink1URL=https://www.analog.com/media/en/technical-documentation/data-sheets/LT3094.pdf, Datasheet Link=https://www.analog.com/media/en/technical-documentation/data-sheets/3042fb.pdf, Height=1.1mm, Library Path 1="Power converters.SchLib", Manufacturer_Part_Number=LT3042IMSE#PBF, Mouser Price/Stock=https://www.mouser.co.uk/ProductDetail/Analog-Devices/LT3042IMSEPBF?qs=oahfZPh6IAKNLbWsEo0jgA%3D%3D, Name Component="Linear Voltage Regulator", Part Number=LT3094, Supplier 1=Digi-key
U6: "Buck Switching Regulator IC Positive Adjustable 0.596V 1 Output 3A SOT-23-6 Thin, TSOT-23-6", Manufacturer="Texas Instruments", Operation Temperature="-40°C ~ 125°C (TJ)", Package=SOT-23-6, Package/Case="SOT 23-6", Power (V/A)="4.5…28 V 3A", Supplier Part Number 1=TPS54202DDCR, Temperature range="-40°C ~ 125°C", Component Status=Released, Component Type=SMD, ComponentDescription="Power converters TPS54302DDCR  (SOT 23-6)", ComponentLink1Description=Datasheet, ComponentLink1URL=https://www.ti.com/lit/ds/symlink/tps54302.pdf, GUID_1C=64c33d38-0494-11ea-ab58-0050569f2651, Library Path 1="Power converters.SchLib", Name Component="Power converters", Part Number=TPS54302DDCR, Part Type="Power / DC-DC / Buck", Price=0.215, Replacement=NONE, Standard Lead Time="12 Weeks", Supplier 1=Mouser
VD1: "DIODE GEN PURP 75V 250MA SOD323", Manufacturer="Diodes Incorporated", Operation Temperature="-55°C ~ 150°C", Package/Case=SOD-80, Power Rating="75V 250mA", ComponentLink1Description=Datasheet, Library Path 1=Diodes.SchLib, Manufacturer P/N=1N4148, Name Component=Diode, Part Number=1N4148, Supplier 1=Digi-key, Supplier Part Number 1=1N4148
VD2 VD3 VD4 VD5: "Diode Array 1 Pair Series Connection 30 V 100mA Surface Mount TO-236-3, SC-59, SOT-23-3", Manufacturer=STMicroelectronics, Operation Temperature="-55°C ~ 150°C", Package/Case=SOT-23, Power Rating="30V 100mA", Supplier Part Number 1=497-2515-1-ND, ComponentLink1Description=Datasheet, ComponentLink1URL=https://www.st.com/content/ccc/resource/technical/document/datasheet/b3/b4/6e/ab/17/40/40/62/CD00000764.pdf/files/CD00000764.pdf/jcr:content/translations/en.CD00000764.pdf, Library Path 1=Diodes.SchLib, Manufacturer P/N=BAR43SFILM, Name Component="Diode Schottky", Part Number=BAR43SFILM, Supplier 1=Digi-Key
VT1: "MOSFET N-CH 20V 6.3A SOT-23", Manufacturer=InfineonTechnologies, Manufacturer P/N=IRLML6244TRPBF, Operation Temperature="-55°C ~ 150°C (TJ)", Package/Case=SOT-23, Power Rating="20V 6.3A", Supplier Part Number 1=IRLML6244TRPBFTR-ND, ComponentLink1Description=Datasheet, ComponentLink1URL=https://www.infineon.com/dgdl/irlml6244pbf.pdf?fileId=5546d462533600a4015356686fed261f, Library Path 1=Transistors.SchLib, Name Component=Transistor, Part Number=IRLML6244, Supplier 1=Digi-key
VT2 VT5: "TRANS PREBIAS NPN 50V 100MA SC75", Manufacturer=onsemi, Operation Temperature="-55°C ~ 150°C (TJ)", Package/Case=SOT-416, Power Rating="100mA 50V", Supplier Part Number 1=DTC143ZET1GOSTR-ND, ComponentLink1Description=Datasheet, ComponentLink1URL=https://www.onsemi.com/pdf/datasheet/dtc143z-d.pdf, Library Path 1=Transistors.SchLib, Manufacturer P/N=DTC143ZET1G, Name Component=Transistor, Part Number=DTC143ZET1G, Supplier 1=Digi-key
VT3: "Bipolar (BJT) Transistor PNP 60 V 3 A 140MHz 2 W Surface Mount SOT-223-3", Manufacturer="Diodes Incorporated", Operation Temperature="-55°C ~ 150°C (TJ)", Package/Case=SOT-223-3, Power Rating="60V 3A", Supplier Part Number 1=FZT751TR-ND, ComponentLink1Description=Datasheet, ComponentLink1URL=https://www.diodes.com/assets/Datasheets/FZT751.pdf, Library Path 1=Transistors.SchLib, Manufacturer P/N=FZT751TA, Name Component=Transistor, Part Number=FZT751TA, Supplier 1=Digi-key
VT4: "P-Channel 20 V 3.7A (Ta) 1.3W (Ta) Surface Mount Micro3™/SOT-23", Manufacturer="Infineon Technologies", Operation Temperature="-55°C ~ 150°C (TJ)", Package/Case=SOT-23-3, Power Rating="30V 3.7A", Supplier Part Number 1=IRLML6402PBFTR-ND, ComponentLink1Description=Datasheet, ComponentLink1URL=https://www.infineon.com/assets/row/public/documents/24/49/irlml6402pbf-1.pdf, Library Path 1=Transistors.SchLib, Manufacturer P/N=IRLML6402TRPBF, Name Component=Transistor, Part Number=IRLML6402TRPBF, Supplier 1=Digi-key
X1: "3.5 Audio Jack SMD", Arrow Part Number=HFD31/5, Manufacturer_Name=Hongfa, Operation Temperature=#NAME?, Arrow Price/Stock=https://www.arrow.com/en/products/hfd315/hongfa-europe-gmbh?region=europe, ComponentLink1Description=Datasheet, ComponentLink1URL=https://e2e.ti.com/cfs-file/__key/communityserver-discussions-components-files/6/2.5_2D00_3.5_2D00_phone_2D00_jack.pdf, Datasheet Link=https://source.hongfa.com//Api/DownloadPdf/152, Height=5.4mm, Library Path 1=Connectors.SchLib, Manufacturer_Part_Number=HFD31/5, Name Component="Audio Jack", Part Number=PJ-327, Supplier 1=Kosmodrom
X3: library part KLS1-TSJ3.5-009, "3.5mm DIP Stereo Jack, Right Angle, DC 30V, 0.5A, 2-20N Insertion Force", Manufacturer="KLS Electronic", Temperature range="-30ºC ~ 70ºC", Ajax_1C_ID=80248, Ajax_1C_PN="Гніздо стерео 3,5мм на п/п (KLS1-TSJ3.5-009)", Ajax_1С_Status="RND Only", Component Status=Released, Component Type=PTH, ComponentLink1Description=Datasheet, ComponentLink1URL=\\altiumdb.ajax.local\files\Datasheet\Connectors\20120807134509KLS1-TSJ3.5-009.pdf, GUID_1C=3459b50e-4b04-11ee-a36c-005056994834, Part Number=KLS1-TSJ3.5-009, Part Type="Audio Jack", Price=0.04, Replacement=NONE
X9: "Mini HDMI Connector With Female SMT 19P 0.5A 40V AC", Manufacturer=KLS, Package/Case=Mini-HDMI, Power (V/A)="40V 0.5A", ComponentLink1Description=Datasheet, ComponentLink1URL=https://www.kycon.com/2013Catalogpage/HDMI/KMDMIX.pdf, Library Path 1=Connectors.SchLib, Manufacturer P/N=HDMI-302-1-N-30, Name Component=MINI_HDMI, Part Number=HDMI-302-1-N-30
XP1: "PIN: 3; A2501; 3A; 250V; UL94V-0", Manufacturer="JOINT TECH", Operation Temperature="-40°C ~ 80°C", ComponentLink1Description=Datasheet, ComponentLink1URL=https://documents.tme.eu/v7/_solaris-tep_/pVersion=0046&contRep=ZT&docId=005056AB752F1EE383C6617DFE942CAD&compId=A2501WV-XP.pdf?ci_sign=9baf55e1d4ede3a69cd97522aa56fece6c405150, Library Path 1=Connectors.SchLib, Name Component="Power Connectors", Part Number=A2501WR-03P, Supplier 1=RCS
XP2: "CONN HEADER 4POS 2.54MM", Manufacturer=CONNFLY, Manufacturer P/N=DS1021-1*4SF11-B, Operation Temperature="-0°C ~ 85°C", Package/Case=2.54mm, Power (V/A)="3А 150В", ComponentLink1Description=Datasheet, ComponentLink1URL=https://static.chipdip.ru/lib/227/DOC000227157.pdf, Library Path 1=Connectors.SchLib, Name Component="Rectangular Connectors - Headers", Part Number=PLS-4, Supplier 1=Kosmodrom
XP3 XP14: "CONN HEADER 3POS 2.54MM", Manufacturer=CONNFLY, Manufacturer P/N=DS1021-1*3SF11-B, Operation Temperature="-0°C ~ 85°C", Package/Case=2.54mm, Power (V/A)="3А 150В", ComponentLink1Description=Datasheet, ComponentLink1URL=https://static.chipdip.ru/lib/227/DOC000227157.pdf, Library Path 1=Connectors.SchLib, Name Component="Rectangular Connectors - Headers", Part Number=PLS-3, Supplier 1=Kosmodrom
XP4 XP5 XP6 XP7 XP8 XP9 XP10 XP11 XP12 XP13: "MHF Series Micro Coaxial Connector Receptacle, Vertical, 3.1x3.0x1.25mm", ComponentLink1Description=Datasheet, ComponentLink1URL=https://www.mupconnector.com/cnmobile/product/show/id/1842.html, Library Path 1=Connectors.SchLib, Name Component="U.FL Connector", Part Number=MUP-R4151-01
ZQ1: "CRYSTAL 24.5760MHZ 18PF SMD", Manufacturer="Abracon LLC", Manufacturer P/N=535-10274-2-ND, Operation Temperature="-40°C ~ 85°C", Package/Case=SMD, Supplier Part Number 1=00-00073443, Tolerance=±20ppm, Library Path 1=Resonator.SchLib, Name Component=Oscillators, Part Number=ABM8G-24.576MHZ-18-D2Y-T, Supplier 1=Kosmodrom

## Free pads (board coordinates)
  round 7 hole 3.2: MH(4,4) MH(45,93) MH(96,4) MH(96,75)

## Via types
v1: diameter 0.6, hole 0.3, Top Layer to Bottom Layer, tented both sides, 2431 vias

## Nets (pads, with @x,y where several pads share a name; then routed paths per layer and width w, separated by ;. In a path a pad name is that pad's centre, name@x,y a point inside that pad or via, vN(x,y) a via of type N, cw(c..) or ccw(c..) an arc to the next point about the centre after c; other vN are vias at no path point)
3V3_ISO: C35.2 C36.2 C38.2 C40.2 C43.2 DD2.1 DD3.16 DD4.1 R29.1 R31.1 X9.18 | length 41.4
  Top Layer w0.23: X9.18@92.517,39.163 93.563,39.163 v1@93.593,39.133
  Top Layer w0.3: DD4.1@86.935,58.432 86.806,58.304 86.806,56.87 C43.2@86.939,56.737 87.099,56.897 87.109,56.897 87.781,57.57 C36.2@88.656,57.57 ; DD3.16@87.671,41.024 C38.2@87.671,42.423 ; C38.2@87.675,42.436 DD2.1@87.675,45.972 ; R31.1@88.645,61.298 88.645,61.907 v1(88.648,61.907)
  Top Layer w0.5: C36.2@88.645,57.463 v1(88.645,58.005) R29.1@88.645,58.548
  Top Layer w0.6: v1(86.885,43.523) C35.2@87.662,43.523 ; C38.2@87.671,42.423 C38.2@87.662,42.423 C38.2@87.675,42.436
  VDD w0.6: v1(88.648,61.907) 88.648,55.537 87.826,54.715 87.826,44.465 v1(86.885,43.523) 86.885,41.32 89.23,38.975 v1@93.576,38.975
  other v1: 93.65,38.975
12V0: C55.2 C56.1 C57.1 C71.2 C72.1 C73.1 C74.1 C189.1 C190.1 FB1.1 FB2.1 FB5.1 R52.2 U6.3 XP1.1 | length 70.4
  Top Layer w0.2: 22.989,39.107 22.989,35.651 23.106,35.533 R52.2@26.911,35.533
  Top Layer w0.7: C189.1@10.8,43.083 10.26,43.083 9.814,43.529 9.814,45.661 10.224,46.071 13.694,46.071 14.104,46.481 FB5.1@14.104,48.45 ; FB1.1@14.569,23.477 14.577,23.47 14.577,21.472 FB2.1@14.584,21.464 ; FB1.1@14.594,23.502 C55.2@14.594,25.592
  Top Layer w1: C56.1@10.8,28.741 11.7,28.741 12,29.041 12,29.145 13.569,30.714 13.569,37.759 10.8,40.528 C189.1@10.8,43.083 ; C189.1@11.407,43.209 15.237,43.209 XP1.1@15.363,43.335 17.137,43.335 17.723,42.749 C190.1@17.723,31.854 ; C56.1@11.945,28.242 C55.2@14.571,25.615 ; C190.1@20.2,32.654 C57.1@20.2,38.44 ; C57.1@20.2,39.107 22.989,39.107 24.877,39.107 C71.2@24.923,39.061
+3.3VA: C1A.1 C1B.1 C1C.1 C2A.1 C2B.1 C2C.1 C47.1 DD1A.44 DD1B.44 DD1C.44 R33.2 U2.9 U2.10 | length 12
  Top Layer w0.2: C47.1@26.01,21.558 26.313,21.861 R33.2@26.313,23.458
  Top Layer w0.3: DD1C.44@44.98,21.519 46.497,21.519 C1C.1@46.53,21.486 ; C1C.1@46.53,21.49 v1(48.306,21.49) ; DD1B.44@67.168,21.519 68.685,21.519 C2B.1@68.718,21.486 ; C2B.1@68.718,21.49 v1(70.494,21.49) ; DD1A.44@89.356,21.519 90.873,21.519 C2A.1@90.906,21.486 ; C2A.1@90.906,21.49 v1(92.683,21.49)
  other v1: 27.247,21.254 27.847,21.254 27.247,21.854 27.847,21.854
+3.3VD: C9A.1 C9B.1 C9C.1 C10A.1 C10B.1 C10C.1 C39.2 C41.2 C44.2 C75.1 C76.1 C77.1 C78.1 C79.1 C80.1 C81.1 C116.2 C118.2 C140.2 C141.2 C146.2 C147.1 DA8.6 DD1A.16 DD1A.17 DD1A.48 DD1B.12 DD1B.16 DD1B.48 DD1C.16 DD1C.48 DD2.16 DD3.1 DD4.8 DD5.17 DD5.32 DD5.34 DD5.45 FB4.1 K1.1 L1.2 L2.2 R16A.1 R16B.1 R16C.1 R25.2 R53.2 R67.1 R99.2 R105.1 R106.1 R128.2 R129.2 VD1.CA VT4.2 XP2.1 | length 166.1
  Top Layer w0.2: R53.2@31.585,35.845 31.779,36.04 35.432,36.04 ; v1(34.965,24.616) 34.059,23.71 34.059,21.908 34.223,21.745 35.43,21.745 35.695,22.009 36.47,22.009 DD1C.16@36.489,22.029 ; v1(56.281,25.089) v1@56.281,25.019 ; DD1B.16@58.668,22.019 57.77,22.019 57.589,21.837 57.233,21.837 R16B.1@57.131,21.735 56.444,21.735 56.281,21.898 v1@56.281,25.019 ; DD1B.12@60.168,25.019 v1@56.281,25.019 ; DD5.45@69.148,74.135 69.148,75.508 cw(c69.246,75.508) 69.246,75.606 R67.1@69.801,75.606 69.803,75.608 69.803,76.252 v1(69.805,76.254) ; DD5.32@73.833,71.451 73.868,71.486 75.242,71.486 v1(75.304,71.548) ; DD5.34@73.833,72.45 74.516,72.45 74.795,72.73 75.253,72.73 v1(75.285,72.762) ; DD1A.16@80.846,22.029 80.065,22.029 ccw(c80.065,21.026) 79.531,21.875 R16A.1@79.356,21.735 ; DD1A.17@80.856,21.519 80.84,21.535 79.531,21.535 79.356,21.71 R16A.1@79.356,21.735 ; v1(78.459,22.988) v1(78.459,22.988) ; v1(78.459,22.988) 78.458,21.87 78.592,21.735 R16A.1@79.356,21.735
  Top Layer w0.26: 69.648,66.016 DD5.17@69.648,67.266
  Top Layer w0.27: C116.2@69.455,65.55 69.465,65.559 69.465,65.833 69.648,66.016